# Altium PCB PCB1.PcbDoc
Units mil, origin at the board's own origin, x right, y up, seen from the top; angles counter-clockwise.
Board outline 6000 x 4000 mil, 2 copper layers (Top Layer, Bottom Layer); 43 components, 25 nets, 252 pads, 0 vias.
Unrouted connection lines stored in the file: 102.
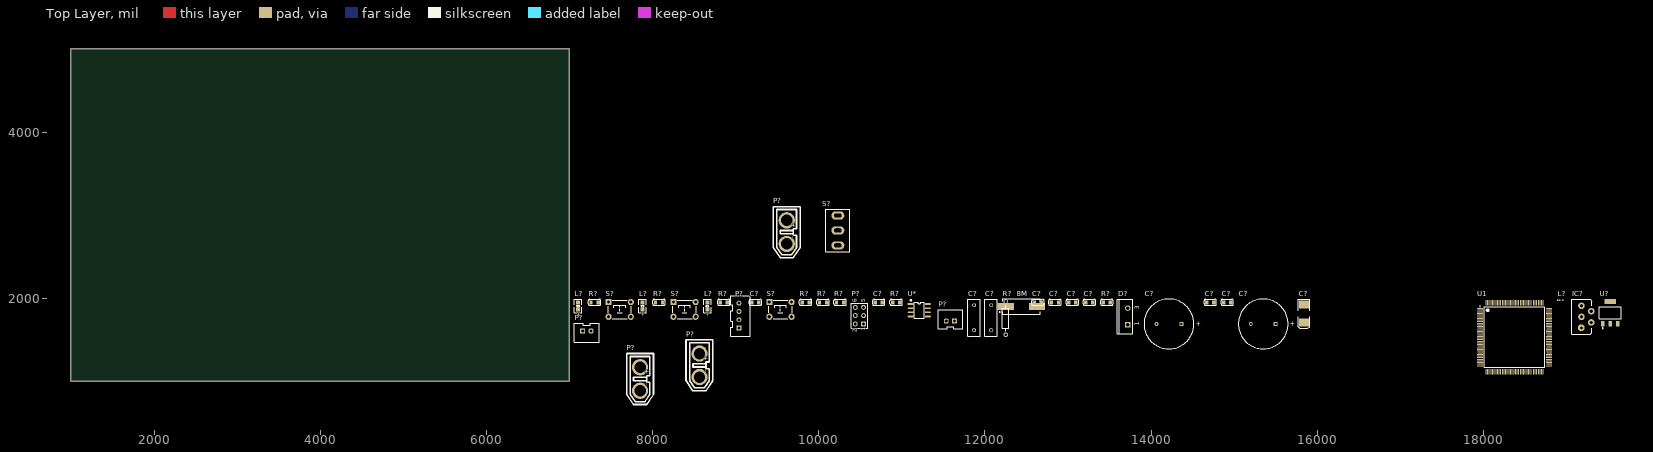
[diagram p0: Top Layer view]
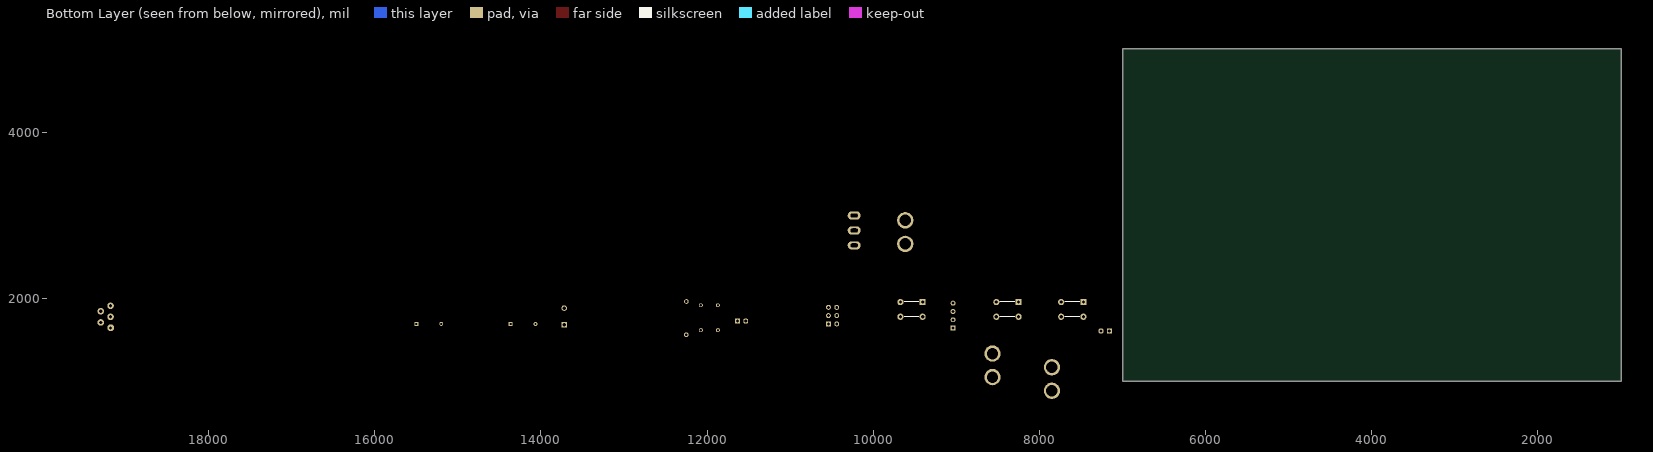
[diagram p1: Bottom Layer view, seen from below]

## Layer stack, top to bottom
Top Solder: solder mask 0.4, Solder Resist, Dk 3.5
Top Layer: signal copper 1.4
Dielectric 1: dielectric 12.6, FR-4, Dk 4.8
Bottom Layer: signal copper 1.4
Bottom Solder: solder mask 0.4, Solder Resist, Dk 3.5

## Board outline
1000,1000 7000,1000 7000,5000 1000,5000

## Design rules (kind name [scope] priority, off if disabled: settings)
Clearance [All] p1: gap=10 ignorepadtopadclearanceinfootprint=FALSE except(0: Arc-Hole Track-Hole SMDPad-Hole THPad-Hole Via-Hole Fill-Hole Poly-Hole Region-Hole Text-Hole)
PolygonConnect [All] p1: connectstyle=Relief reliefconductorwidth=10 reliefentries=4 polygonreliefangle="90 Angle" airgapwidth=10
RoomDefinition Sheet1 [InComponentClass('Sheet1')] p1: confinementstyle=ConfineIn formatcopy=TRUE lockcomponents=FALSE outline 0,0 2000,0 2000,1000 0,1000
RoutingVias [All] p1: holewidth=28 width=50 viastyle="Through Hole" minholewidth=28 minwidth=50 maxholewidth=28 maxwidth=50
SolderMaskExpansion [All] p1: expansion=4
Width [All] p1: maxlimit=10 minlimit=10 preferedwidth=10
30 further rules are at their usual default settings.

## Classes and differential pairs
component class Sheet1: 8M C? D? IC? L? P? R? S? U1 U* U?

## Components (designator, comment, footprint, x,y, rotation, side; value= is the part's Value field where it differs from the comment)
8M "XTAL" XTAL-QC49/SMD 12440,1900 r0 top
C? "Cap" RAD-0.3 11870,1765 r90 top value=20p
C? "" 0805C 9195,1950 r0 top value=104
C? "Cap" RAD-0.3 12075,1765 r90 top value=20p
C? "" 0805C 14670,1950 r0 top value=104
C? "Cap Pol1" RB7.6-15 15350,1690 r0 top value=100pF
C? "" 0805C 13215,1950 r0 top value=104
C? "" C6032 15840,1820 r90 top value=220uF
C? "Cap Pol1" RB7.6-15 14215,1690 r0 top value=1000uF
C? "" 0805C 14875,1950 r0 top value=104
C? "" 0805C 13010,1950 r0 top value=10uF
C? "" 0805C 12595,1950 r0 top value=225
C? "" 0805C 10680,1950 r0 top value=104
C? "" 0805C 12800,1950 r0 top value=225
D? "IN5882" TO-220AC 13720,1780 r90 top
IC? "LM2576-5.0V" TO220-5B 19180,1775 r90 top
L? "LED1" LED0805 7105,1865 r90 top
L? "LED0" LED0805 7880,1865 r90 top
L? "Inductor" 0402-A 18935,1975 r0 top value=10ouH
L? "PWR" LED0805 8660,1865 r90 top
P? "XT30" XT60H-M 9615,2795 r90 top
P? "XT30" XT60H-M 8565,1191.73 r90 top
P? "XT60" XT60H-M 7850,1026.73 r90 top
P? "XH2.54*2" XH2.54-2 7260,1605 r0 top
P? "XH2.54*2" XH2.54-2 11535,1725 r180 top
P? "XH2.54*4" XH2.54-4 9040,1640 r90 top
P? "Header 3X2" HDR2X3 10540,1690 r90 top
R? "" 0805R 8035,1950 r0 top value=10
R? "" 0805R 10010,1950 r0 top value=10K
R? "Res2" AXIAL-0.4 12250,1760 r90 top value=1K
R? "" 0805R 10215,1950 r0 top value=10K
R? "" 0805R 9800,1950 r0 top value=10K
R? "" 0805R 8815,1950 r0 top value=10
R? "" 0805R 13425,1950 r0 top value=10R
R? "" 0805R 10890,1950 r0 top value=120R
R? "" 0805R 7260,1950 r0 top value=10
S? "" "TSW DIP-6*6*5" 7605,1865 r0 top
S? "" "TSW DIP-6*6*5" 8385,1865 r0 top
S? "开关" 拨动开关 10230,2815 r90 top
S? "" "TSW DIP-6*6*5" 9540,1865 r0 top
U1 "STM32F407ZGT6" STM-LQFP144_N 18375,1530 r0 top
U* "TJA1050" SOP8_N 11210,1855 r0 top
U? "ASM1117-3.3" SOT223 19525,1825 r0 top

## Footprints (in the part's own frame and the unit in brackets; to place one, negate y for a bottom-side part, rotate by r counter-clockwise, add the part's x,y. Pads: shape width x height; smd on the part's side, far side on the other; paste and mask are expansions set on the pad)
0402-A [mm] "Chip Inductor, Body 1.0x0.5mm, IPC High Density"
  rect 0.6x0.5 smd: 1(-0.5,0) 2(0.5,0)
  silkscreen extent -1.1,-0.15 -1.1,0.15, body extent -0.55,-0.3 0.55,0.3, height 0.55
0805C [mil]
  rect 40x50 smd: 1(0,0) 2(85,0)
  silkscreen extent -32,-38 117,38, body extent 3,-25 82,25, height 30
0805R [mil]
  rect 40x50 smd: 1(0,0) 2(85,0)
  silkscreen extent -32,-38 117,38, body extent 3,-25 82,25, height 30
AXIAL-0.4 [mm] "Axial Device, Thru-Hole; 2 Leads; 0.4 in Pin Spacing"
  round 1.4 hole 0.85: 1(-5.08,0) 2(5.08,0)
  silkscreen extent -4.06,-1.02 4.06,1.02
C6032 [mil] "C型"
  rect 95x120 smd: 1(-112,1) 2(104,1)
  silkscreen extent -183,-69 169,71, body extent -121,-62 115,64, height 102
HDR2X3 [mm] "Connector; Header; 3x2 Position"
  rect 1.5x1.5 hole 0.9: 1(0,0)
  round 1.5 hole 0.9: 2(0,2.54) 3(2.54,0) 4(2.54,2.54) 5(5.08,0) 6(5.08,2.54)
  silkscreen extent -1.27,-1.27 6.35,3.81
LED0805 [mil] "1/8W"
  rect 50x50 smd: 1(0,0) 2(82.3,0.2)
  silkscreen extent -40,-45 122,45, body extent 2,-25 80,25, height 20
RAD-0.3 [mm] "Radial Cap, Thru-Hole; 2 Leads; 0.3 in Pin Spacing"
  round 1.2 hole 0.7: 1(-3.81,0) 2(3.81,0)
  silkscreen extent -5.71,-1.91 5.71,1.91
RB7.6-15 [mm] "Polarized Capacitor (Radial); 2 Leads"
  rect 1.2x1.2 hole 0.7: 1(3.81,0)
  round 1.2 hole 0.7: 2(-3.81,0)
  silkscreen extent -7.62,-7.62 7.62,7.62
SOP8_N [mm] "5*6*1.8mm（长宽高）"
  rect 1.8x0.5 smd: 1(-2.625,1.905)
  oval 1.8x0.5 smd: 2(-2.625,0.635) 3(-2.625,-0.635) 4(-2.625,-1.905) 5(2.625,-1.905) 6(2.625,-0.635) 7(2.625,0.635) 8(2.625,1.905)
  silkscreen extent -2.69,-2.5 1.52,3.2, body extent -3,-2.5 3,2.5, height 1.9
SOT223 [mm] "SOT-223/SC-73; 4 Leads; Body 6.7 x 7.3 mm, inc. leads (LxW max)"
  rect 1.1x1.55 smd: 1(-2.3,-3.375) 2(0,-3.375) 3(2.3,-3.375)
  rect 3.45x1.55 smd: 4(0,3.375)
  silkscreen extent -3.35,-4.82 3.35,1.85, body extent -3.25,-3.47 3.25,3.49, height 1.66
STM-LQFP144_N [mm] "Thin QFP, 144-Leads, Body 20x20mm, Pitch 0.5mm, IPC Medium Density"
  oval 1.8x0.3 smd: 1(-10.55,8.75) 2(-10.55,8.25) 3(-10.55,7.75) 4(-10.55,7.25) 5(-10.55,6.75) 6(-10.55,6.25) 7(-10.55,5.75) 8(-10.55,5.25) 9(-10.55,4.75) 10(-10.55,4.25) 11(-10.55,3.75) 12(-10.55,3.25) 13(-10.55,2.75) 14(-10.55,2.25) 15(-10.55,1.75) 16(-10.55,1.25) 17(-10.55,0.75) 18(-10.55,0.25) 19(-10.55,-0.25) 20(-10.55,-0.75) 21(-10.55,-1.25) 22(-10.55,-1.75) 23(-10.55,-2.25) 24(-10.55,-2.75) 25(-10.55,-3.25) 26(-10.55,-3.75) 27(-10.55,-4.25) 28(-10.55,-4.75) 29(-10.55,-5.25) 30(-10.55,-5.75) 31(-10.55,-6.25) 32(-10.55,-6.75) 33(-10.55,-7.25) 34(-10.55,-7.75) 35(-10.55,-8.25) 36(-10.55,-8.75) 73(10.55,-8.75) 74(10.55,-8.25) 75(10.55,-7.75) 76(10.55,-7.25) 77(10.55,-6.75) 78(10.55,-6.25) 79(10.55,-5.75) 80(10.55,-5.25) 81(10.55,-4.75) 82(10.55,-4.25) 83(10.55,-3.75) 84(10.55,-3.25) 85(10.55,-2.75) 86(10.55,-2.25) 87(10.55,-1.75) 88(10.55,-1.25) 89(10.55,-0.75) 90(10.55,-0.25) 91(10.55,0.25) 92(10.55,0.75) 93(10.55,1.25) 94(10.55,1.75) 95(10.55,2.25) 96(10.55,2.75) 97(10.55,3.25) 98(10.55,3.75) 99(10.55,4.25) 100(10.55,4.75) 101(10.55,5.25) 102(10.55,5.75) 103(10.55,6.25) 104(10.55,6.75) 105(10.55,7.25) 106(10.55,7.75) 107(10.55,8.25) 108(10.55,8.75)
  oval 0.3x1.8 smd: 37(-8.75,-10.55) 38(-8.25,-10.55) 39(-7.75,-10.55) 40(-7.25,-10.55) 41(-6.75,-10.55) 42(-6.25,-10.55) 43(-5.75,-10.55) 44(-5.25,-10.55) 45(-4.75,-10.55) 46(-4.25,-10.55) 47(-3.75,-10.55) 48(-3.25,-10.55) 49(-2.75,-10.55) 50(-2.25,-10.55) 51(-1.75,-10.55) 52(-1.25,-10.55) 53(-0.75,-10.55) 54(-0.25,-10.55) 55(0.25,-10.55) 56(0.75,-10.55) 57(1.25,-10.55) 58(1.75,-10.55) 59(2.25,-10.55) 60(2.75,-10.55) 61(3.25,-10.55) 62(3.75,-10.55) 63(4.25,-10.55) 64(4.75,-10.55) 65(5.25,-10.55) 66(5.75,-10.55) 67(6.25,-10.55) 68(6.75,-10.55) 69(7.25,-10.55) 70(7.75,-10.55) 71(8.25,-10.55) 72(8.75,-10.55) 109(8.75,10.55) 110(8.25,10.55) 111(7.75,10.55) 112(7.25,10.55) 113(6.75,10.55) 114(6.25,10.55) 115(5.75,10.55) 116(5.25,10.55) 117(4.75,10.55) 118(4.25,10.55) 119(3.75,10.55) 120(3.25,10.55) 121(2.75,10.55) 122(2.25,10.55) 123(1.75,10.55) 124(1.25,10.55) 125(0.75,10.55) 126(0.25,10.55) 127(-0.25,10.55) 128(-0.75,10.55) 129(-1.25,10.55) 130(-1.75,10.55) 131(-2.25,10.55) 132(-2.75,10.55) 133(-3.25,10.55) 134(-3.75,10.55) 135(-4.25,10.55) 136(-4.75,10.55) 137(-5.25,10.55) 138(-5.75,10.55) 139(-6.25,10.55) 140(-6.75,10.55) 141(-7.25,10.55) 142(-7.75,10.55) 143(-8.25,10.55) 144(-8.75,10.55)
  silkscreen extent -10.67,-9.25 9.25,9.57, body extent -10,-10 10,10, height 1.6
TO220-5B [mm] "220，5脚晶体管"
  oct 2x2 hole 1: 1(-3.378,0)
  round 2 hole 1: 2(-1.7,-3) 3(0,0) 4(1.7,-3) 5(3.378,0)
  silkscreen extent -5.26,-3.18 5.36,2.95, body extent -5.05,-3.23 5.05,2.7, height 17.5
TO-220AC [mm] "TO, Thru-Hole, Vertical, Heatsink Mounted; 3 In-Line Leads (1 Absent); Pitch 2.54 mm"
  rect 1.7x1.7 hole 1.1: 1(-2.54,0)
  round 1.7 hole 1.1: 3(2.54,0)
  silkscreen extent -5.3,-1.45 5.3,3.15
"TSW DIP-6*6*5" [mm] "6*6*5mm"
  rect 1.9x1.9 hole 1: 1(-3.4,2.25)
  round 1.9 hole 1: 2(-3.4,-2.25) 3(3.4,-2.25) 4(3.4,2.25)
  silkscreen extent -3.56,-2.79 3.56,2.79, body extent -4.11,-3 4.11,3, height 4.95
XH2.54-2 [mil]
  rect 60x65 hole 39.37: 1(-100.1,0)
  oval 60x65 hole 39.37: 2(0,0)
  silkscreen extent -200,-138 97,93, body extent -198,-142 98,94, height 276
XH2.54-4 [mm]
  rect 1.5x1.5 hole 0.9: 1(0,0)
  round 1.5 hole 0.9: 2(2.54,0) 3(5.08,0) 4(7.62,0)
  silkscreen extent -2.44,-3.45 9.93,2.49, body extent -2.42,-3.38 9.98,2.37, height 7
XT60H-M [mm] "XT60H-接头-母座"
  round 5 hole 3.5: 1(-3.6,0) 2(3.6,0)
  silkscreen extent -7.8,-4.1 7.8,4.1, body extent -7.95,-4.11 7.95,4.04, height 17.5
XTAL-QC49/SMD [mm]
  rect 5x2 smd: 1(-4.75,0) 2(4.75,0)
  silkscreen extent -6.75,-2.4 5.7,2.4, body extent -6.7,-2.46 6.7,2.44, height 4
拨动开关 [mm]
  oval 2.5x4 hole 1.2 slot 2.2 at 90 deg: 1(-4.572,0) 2(0,0) 3(4.572,0)
  silkscreen extent -6.48,-3.68 6.48,3.68, body extent -6.35,-5.08 6.36,5.08, height 28.95

## Part data
8M: "Crystal Oscillator", LatestRevisionDate=17-Jul-2002, LatestRevisionNote="Re-released for DXP Platform.", PackageDescription="Crystal, Thru-Hole; 2 Leads; Body 3.1 x 8.2 mm (Dia.xH)", PackageReference=R38, Published=8-Jun-2000, Publisher="Altium Limited"
C? C?: "Capacitor", LatestRevisionDate=17-Jul-2002, LatestRevisionNote="Re-released for DXP Platform.", PackageDescription="Radial Cap, Thru-Hole; 2 Leads; 0.3 in Pin Spacing", PackageReference=RAD-0.3, Published=8-Jun-2000, Publisher="Altium Limited"
C? C? C? C? C? C? C? C?: library part Cap, "Capacitor", LatestRevisionDate=17-Jul-2002, LatestRevisionNote="Re-released for DXP Platform.", PackageDescription="Radial Cap, Thru-Hole; 2 Leads; 0.3 in Pin Spacing", PackageReference=RAD-0.3, Published=8-Jun-2000, Publisher="Altium Limited"
C? C?: "Polarized Capacitor (Radial)", LatestRevisionDate=17-Jul-2002, LatestRevisionNote="Re-released for DXP Platform.", PackageDescription="Polarized Capacitor (Radial); 2 Leads", PackageReference=RB7.6-15, Published=8-Jun-2000, Publisher="Altium Limited"
C?: library part "Cap Pol1", "Polarized Capacitor (Radial)", LatestRevisionDate=17-Jul-2002, LatestRevisionNote="Re-released for DXP Platform.", PackageDescription="Polarized Capacitor (Radial); 2 Leads", PackageReference=RB7.6-15, Published=8-Jun-2000, Publisher="Altium Limited"
D?: library part "Diode 10TQ035", "Schottky Rectifier", ComponentLink1Description="Manufacturer Link", ComponentLink1URL=http://www.irf.com/, ComponentLink2Description=Datasheet, ComponentLink2URL=http://www.irf.com/product-info/datasheets/data/10tq.pdf, DatasheetVersion=PD-2.057B, LatestRevisionDate=17-Jul-2002, LatestRevisionNote="Re-released for DXP Platform.", Note="Terminal 2 is the TAB and is electrically connected to the cathode", PackageDescription="TO, Thru-Hole, Vertical, Heatsink Mounted; 3 In-Line Leads (1 Absent); Pitch 2.54 mm", PackageReference=TO-220AC, PackageVersion=Feb-1998, Published=8-Jun-2000, Publisher="Altium Limited"
IC?: library part LM2576, "DC降压芯片"
L? L? L?: library part LED
P? P? P? P? P?: library part "Header 2", "Header, 2-Pin", LatestRevisionDate=17-Jul-2002, LatestRevisionNote="Re-released for DXP Platform.", Publisher="Altium Limited"
P?: library part "Header 4", "Header, 4-Pin", LatestRevisionDate=17-Jul-2002, LatestRevisionNote="Re-released for DXP Platform.", Publisher="Altium Limited"
P?: "Header, 3-Pin, Dual row", LatestRevisionDate=17-Jul-2002, LatestRevisionNote="Re-released for DXP Platform.", Publisher="Altium Limited"
R? R? R? R? R? R? R? R?: library part Res2, "Resistor", LatestRevisionDate=17-Jul-2002, LatestRevisionNote="Re-released for DXP Platform.", PackageDescription="Axial Device, Thru-Hole; 2 Leads; 0.4 in Pin Spacing", PackageReference=AXIAL-0.4, Published=8-Jun-2000, Publisher="Altium Limited"
R?: "Resistor", LatestRevisionDate=17-Jul-2002, LatestRevisionNote="Re-released for DXP Platform.", PackageDescription="Axial Device, Thru-Hole; 2 Leads; 0.4 in Pin Spacing", PackageReference=AXIAL-0.4, Published=8-Jun-2000, Publisher="Altium Limited"
S? S? S?: library part SW-PB, "Switch", LatestRevisionDate=17-Jul-2002, LatestRevisionNote="Re-released for DXP Platform.", PackageDescription="Switch; 2 Leads", PackageReference=SPST-2, Published=24-Mar-1999, Publisher="Altium Limited"
S?: library part 拨动开关（三脚）
U1: "ARM Cortex-M4 32-bit MCU+FPU, 210 DMIPS, 1024 kB Flash, 192 kB Internal RAM, 114 I/Os, 144-pin LQFP, -40 to 85 degC, Tray", I/Os (High Current)=114, Manufacturer=STMicroelectronics, Operating Frequency(F) (Processor speed) (MHz)=168, Supplier Part Number 1=497-11766-ND, Supply Voltage(Vcc) max (V)=3.6, Supply Voltage(Vcc) min (V)=1.8, ComponentLink1Description="Manufacturer URL", ComponentLink1URL=http://www.st.com/web/en/home.html, ComponentLink2Description=Datasheet, ComponentLink2URL=http://www.st.com/st-web-ui/static/active/en/resource/technical/document/datasheet/DM00037051.pdf, ComponentLink3Description="Package Specification", ComponentLink3URL=http://www.st.com/st-web-ui/static/active/en/resource/technical/document/datasheet/DM00037051.pdf, Core="ARM Cortex-M4", D/A Converter=2x12-bit, DatasheetVersion="Rev. 4", FLASH Size (Prog) (kB)=1024, Internal RAM Size (kB)=192, Mounting Technology="Surface Mount", PackageDescription="144-Pin Low Profile Quad Flat Package, 20 x 20 mm Body, 0.5 mm Pitch", PackageReference=LQFP144, PackageVersion="Rev. 4, 06/2013", Packing=Tray, PartNumber=STM32F407ZGT6, Supplier 1=Digi-Key, Supplier 2=Newark, Supplier 3=Mouser, Supplier Part Number 2=73T2334, Supplier Part Number 3=511-STM32F407ZGT6
U*: library part 24CL256
U?: library part LM317, "3-Terminal Adjustable Positive Voltage Regulator"
L?: Code_IEC=1005, Code_JEITA=0402, LatestRevisionDate=29-May-2009, LatestRevisionNote="IPC-7351 Footprint Added.", PackageDescription="Chip Inductor", PackageReference=0402-A, Published=8-Jun-2000, Publisher="Altium Limited"

## Nets (pads, with @x,y where several pads share a name; then routed paths per layer and width w, separated by ;. In a path a pad name is that pad's centre, name@x,y a point inside that pad or via, vN(x,y) a via of type N, cw(c..) or ccw(c..) an arc to the next point about the centre after c; other vN are vias at no path point)
BOOT0: R?.1@10010,1950 U1.138
BOOT1: R?.2@10300,1950 U1.48
CAN_RX: U1.103 U*.4
CAN_TX: U1.104 U*.1
GND: C?.1@9195,1950 C?.1@10680,1950 C?.1@11870,1615 C?.1@12075,1615 C?.1@12800,1950 C?.1@13010,1950 C?.1@13215,1950 C?.1@14670,1950 C?.1@14875,1950 C?.2@12680,1950 C?.2@14065,1690 C?.2@15200,1690 C?.2@15839,1924 D?.3 IC?.3 IC?.5 L?.2@8659.8,1947.3 P?.2@7850,1168.46 P?.2@8565,1333.46 P?.2@9040,1740 P?.2@9615,2936.73 P?.5 P?.6 S?.1@7471.14,1953.58 S?.1@8251.14,1953.58 S?.2@9406.14,1776.42 U1.16 U1.31 U1.38 U1.51 U1.61 U1.83 U1.94 U1.107 U1.120 U1.130 U*.2 U*.8 U?.1
KEY0: S?.2@8251.14,1776.42 U1.1
KEY1: S?.2@7471.14,1776.42 U1.2
LED0: L?.2@7879.8,1947.3 U1.21
LED1: L?.2@7104.8,1947.3
Net8M_1: 8M.1 C?.2@11870,1915 R?.2@12250,1960 U1.8
Net8M_2: 8M.2 C?.2@12075,1915 R?.1@12250,1560 U1.9
NetC?_1: C?.1@12595,1950 U1.106
NetC?_2: C?.2@12885,1950 U1.71
NetD?_1: D?.1 IC?.2 L?.1@18915.31,1975
NetL?_1: L?.1@7880,1865 R?.2@8120,1950
NetP?_1: P?.1@7159.9,1605 P?.1@11635.1,1725 R?.1@10890,1950 U*.7
NetP?_2: P?.2@7260,1605 P?.2@11535,1725 R?.2@10975,1950 U*.6
NetP?_3: P?.3@10540,1790 R?.2@10095,1950
NetP?_4: P?.4@10440,1790 R?.1@10215,1950
RESET: C?.2@9280,1950 R?.2@9885,1950 S?.1@9406.14,1953.58 U1.25
SWCLK: P?.1@9040,1640 U1.109
SWDIO: P?.3@9040,1840 U1.105
VCC3.3: C?.1@15839,1708 C?.2@14960,1950 P?.1@10540,1690 P?.2@10440,1690 P?.4@9040,1940 R?.1@7260,1950 R?.1@8035,1950 R?.1@8815,1950 R?.1@9800,1950 R?.1@13425,1950 U1.6 U1.17 U1.30 U1.32 U1.39 U1.52 U1.62 U1.72 U1.84 U1.95 U1.108 U1.121 U1.131 U1.143 U1.144 U?.2
VCC5: C?.1@14365,1690 C?.2@10765,1950 C?.2@14755,1950 IC?.4 L?.2@18954.69,1975 U*.3 U?.3
VCC24: P?.1@7850,885 P?.1@8565,1050 P?.1@9615,2653.27 S?.2@10230,2815
pads on no net: C?.1@15500,1690 C?.2@13095,1950 C?.2@13300,1950 IC?.1 L?.1@7105,1865 L?.1@8660,1865 R?.2@7345,1950 R?.2@8900,1950 R?.2@13510,1950 S?.1@10230,2635 S?.3 S?.4 U1.3 U1.4 U1.5 U1.7 U1.10 U1.11 U1.12 U1.13 U1.14 U1.15 U1.18 U1.19 U1.20 U1.22 U1.23 U1.24 U1.26 U1.27 U1.28 U1.29 U1.33 U1.34 U1.35 U1.36 U1.37 U1.40 U1.41 U1.42 U1.43 U1.44 U1.45 U1.46 U1.47 U1.49 U1.50 U1.53 U1.54 U1.55 U1.56 U1.57 U1.58 U1.59 U1.60 U1.63 U1.64 U1.65 U1.66 U1.67 U1.68 U1.69 U1.70 U1.73 U1.74 U1.75 U1.76 U1.77 U1.78 U1.79 U1.80 U1.81 U1.82 U1.85 U1.86 U1.87 U1.88 U1.89 U1.90 U1.91 U1.92 U1.93 U1.96 U1.97 U1.98 U1.99 U1.100 U1.101 U1.102 U1.110 U1.111 U1.112 U1.113 U1.114 U1.115 U1.116 U1.117 U1.118 U1.119 U1.122 U1.123 U1.124 U1.125 U1.126 U1.127 U1.128 U1.129 U1.132 U1.133 U1.134 U1.135 U1.136 U1.137 U1.139 U1.140 U1.141 U1.142 U*.5 U?.4

## Text inside footprints (layer, text, board x,y; h text height)
C?: Top Overlay "+" at 15670.15,1660.99 h59.06
C?: Top Overlay "+" at 14535.15,1660.99 h59.06
D?: Top Overlay "1" at 13854.84,1670.16 h59.06 r90; Top Overlay "3" at 13854.84,1860.32 h59.06 r90
L?: Top Overlay "+" at 8679,1816 h30 r90
L?: Top Overlay "+" at 7899,1816 h30 r90
L?: Top Overlay "+" at 7124,1816 h30 r90
P?: Top Overlay "+" at 8685,1246.73 h80 r90; Top Overlay "-" at 8680,1116.73 h80 r90
P?: Top Overlay "+" at 9735,2850 h80 r90; Top Overlay "-" at 9730,2720 h80 r90
P?: Top Overlay "+" at 7970,1081.73 h80 r90; Top Overlay "-" at 7965,951.73 h80 r90
P?: Top Overlay "6" at 10460,1950 h50 r90; Top Overlay "5" at 10560,1950 h50 r90; Top Overlay "2" at 10460,1590 h50 r90; Top Overlay "1" at 10560,1610 h50 r90